# Altium PCB transmitter.PcbDoc
Units mil, origin at the board's own origin, x right, y up, seen from the top; angles counter-clockwise.
Board outline 1968.5 x 3897.64 mil, 2 copper layers (Top Layer, Bottom Layer); 38 components, 10 nets, 105 pads, 26 vias.
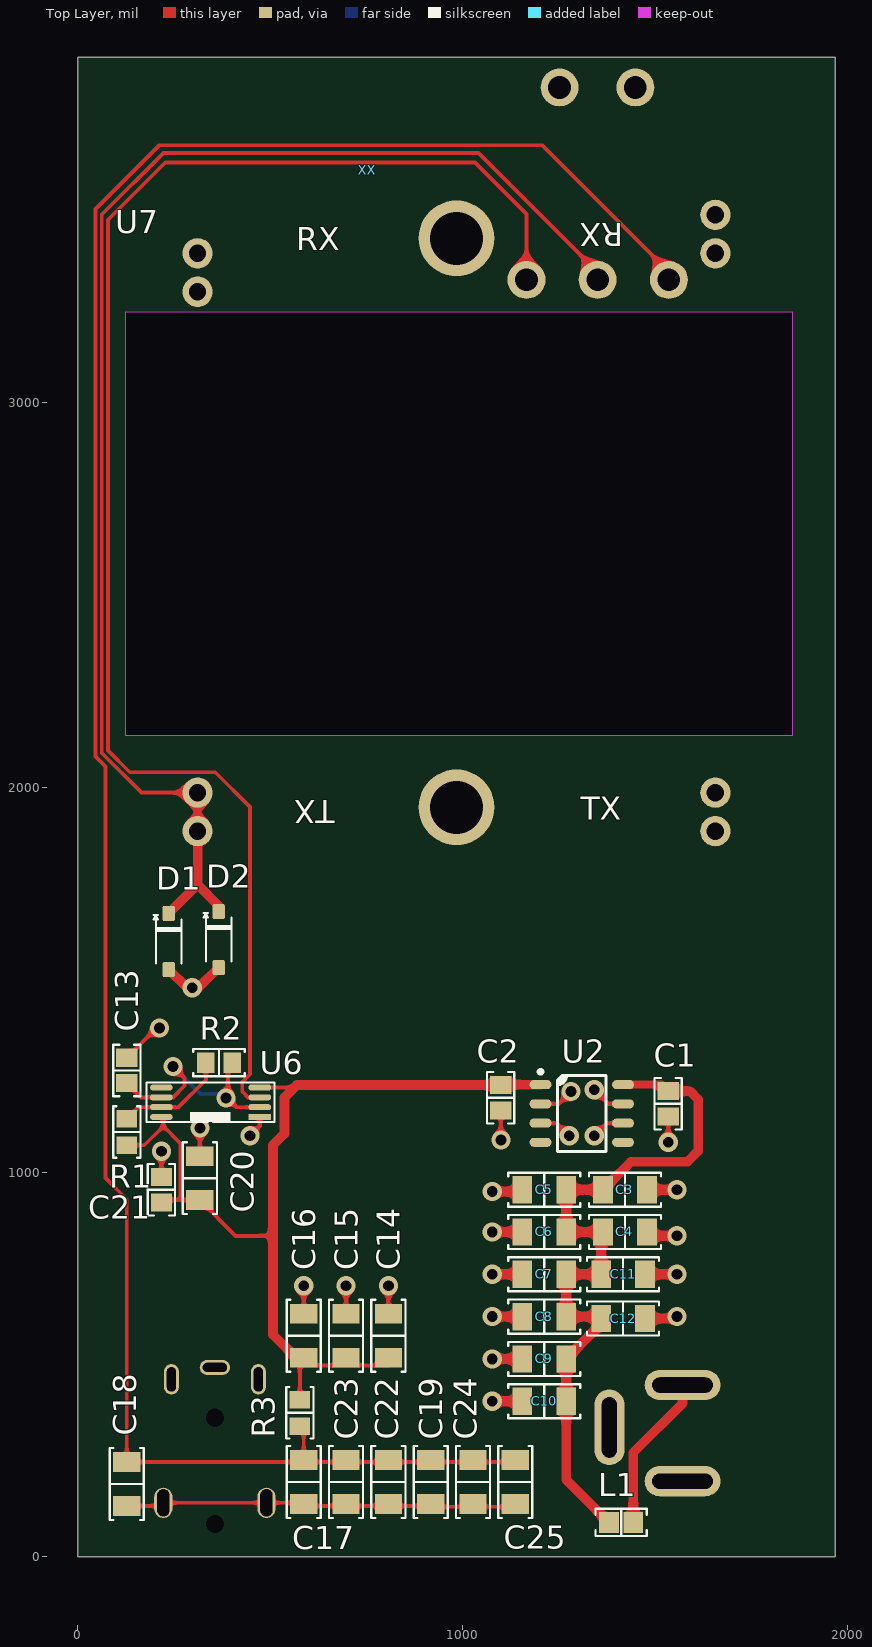
[diagram p0: Top Layer view]
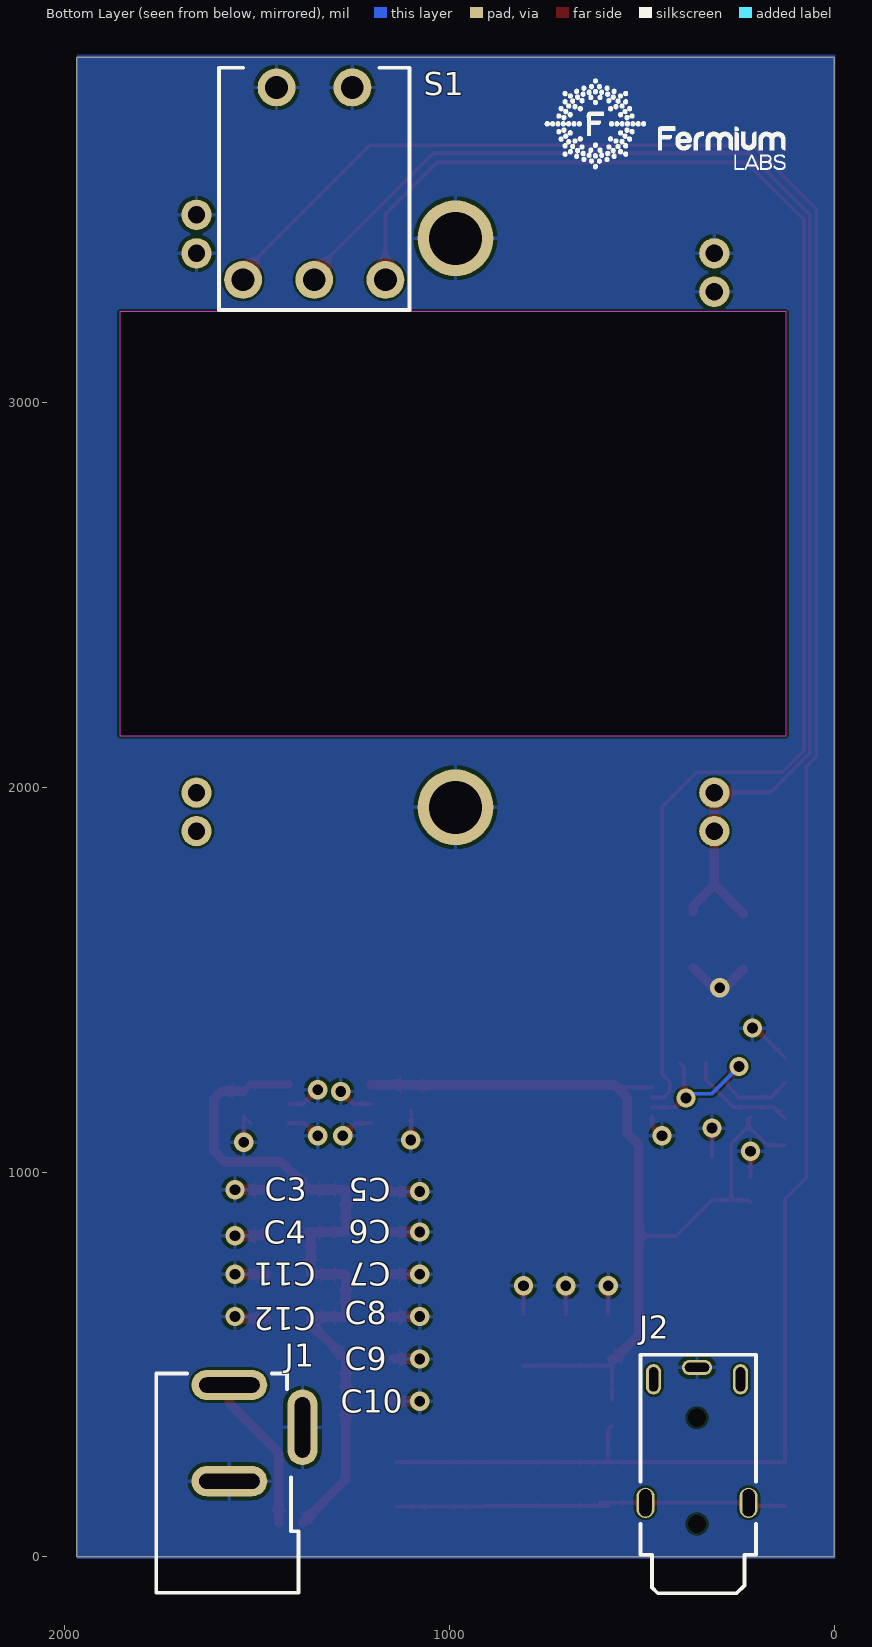
[diagram p1: Bottom Layer view, seen from below]
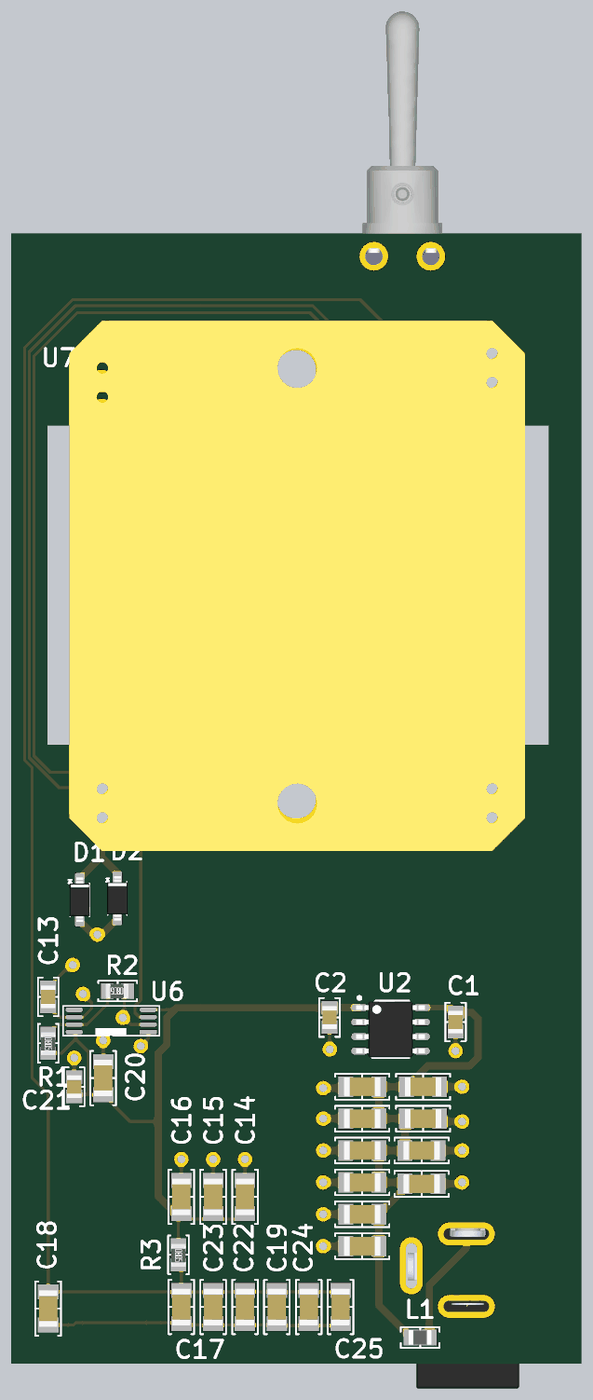
[diagram p2: 3D render of the assembled board from above, using the file's embedded part models]
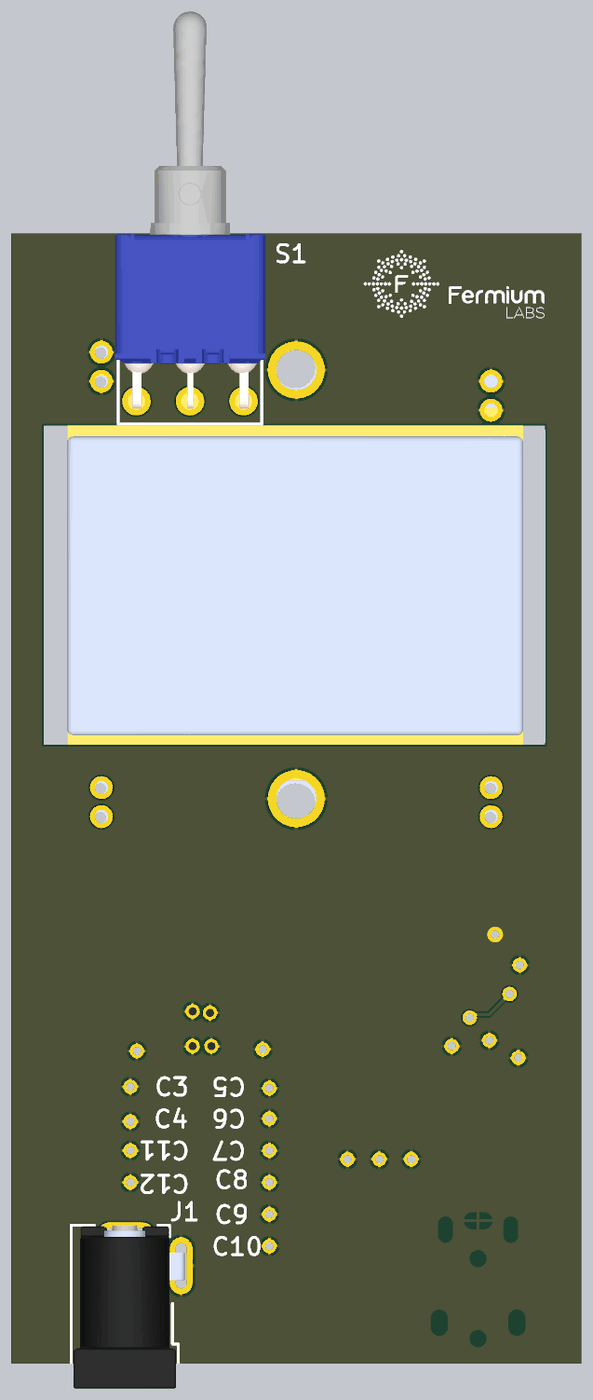
[diagram p3: 3D render of the assembled board from below, using the file's embedded part models]

## Layer stack, top to bottom
Top Solder: solder mask 0.4, Solder Resist, Dk 3.5
Top Layer: signal copper 1.4
Dielectric 1: dielectric 12.6, FR-4, Dk 4.8
Bottom Layer: signal copper 1.4
Bottom Solder: solder mask 0.4, Solder Resist, Dk 3.5

## Board outline
0,0 1968.5,0 1968.5,3897.64 0,3897.64

## Design rules (kind name [scope] priority, off if disabled: settings)
Clearance [All] p1: gap=6 ignorepadtopadclearanceinfootprint=FALSE
FanoutControl Fanout_LCC [All] p1 off: bgadir=Out bgaviamode=Centered fanoutstyle=Auto fanoutdirection=Alternating viagrid=1 // Protel DXP Scope 1 Expression Was: IsLCC   Fanout_LCC (Default Rule)
FanoutControl Fanout_BGA [All] p2 off: bgadir=Out bgaviamode=Centered fanoutstyle=Auto fanoutdirection=Alternating viagrid=1 // Protel DXP Scope 1 Expression Was: IsBGA   Fanout_BGA (Default Rule)
FanoutControl Fanout_SOIC [All] p3 off: bgadir=Out bgaviamode=Centered fanoutstyle=Auto fanoutdirection=Alternating viagrid=1 // Protel DXP Scope 1 Expression Was: IsSOIC   Fanout_SOIC (Default Rule)
FanoutControl Fanout_Default [All] p4: bgadir=Out bgaviamode=Centered fanoutstyle=Auto fanoutdirection=Alternating viagrid=1 // Fanout_Default (Default Rule)
FanoutControl Fanout_Small [All] p5 off: bgadir=Out bgaviamode=Centered fanoutstyle=Auto fanoutdirection=Alternating viagrid=1 // Protel DXP Scope 1 Expression Was: (CompPinCount < 5)   Fanout_Small (Default Rule)
HoleSize [All] p1: absolutevalues=TRUE maxlimit=99999 minlimit=11.81 maxpercent=80.000 minpercent=20.000
MinimumSolderMaskSliver [All] p1 off: minsoldermaskwidth=10
PolygonConnect [All] p1: connectstyle=Relief reliefconductorwidth=10 reliefentries=4 polygonreliefangle="90 Angle" airgapwidth=10
RoutingVias [All] p1: holewidth=28 width=50 viastyle="Through Hole" minholewidth=28 minwidth=50 maxholewidth=28 maxwidth=50
SilkToSilkClearance [All] p1: silktosilkclearance=7.87
SilkToSolderMaskClearance [All] p1 off: minsilkscreentomaskgap=10 clearancetoexposedcopper=TRUE // Protel DXP Scope 1 Expression Was: IsPad
SolderMaskExpansion [All] p1: expansion=2
Width [All] p1: maxlimit=200 minlimit=6 preferedwidth=10
21 further rules are at their usual default settings.

## Components (designator, comment, footprint, x,y, rotation, side; value= is the part's Value field where it differs from the comment)
C1 "" "CAP 0805/2012" 1534.57,1177.91 r270 top
C2 "" "CAP 0805/2012" 1099.24,1193.65 r270 top
C3 "" "CAP 1206/3216" 1422.24,954.65 r0 top
C4 "" "CAP 1206/3216" 1422.24,844.65 r0 top
C5 "" "CAP 1206/3216" 1212.24,954.65 r180 top
C6 "" "CAP 1206/3216" 1212.24,844.65 r180 top
C7 "" "CAP 1206/3216" 1212.24,734.65 r180 top
C8 "" "CAP 1206/3216" 1212.24,624.65 r180 top
C9 "" "CAP 1206/3216" 1212.24,514.65 r180 top
C10 "" "CAP 1206/3216" 1212.24,404.65 r180 top
C11 "" "CAP 1206/3216" 1417.24,734.65 r0 top
C12 "" "CAP 1206/3216" 1417.24,619.65 r0 top
C13 "" "CAP 0805/2012" 127.24,1264.65 r90 top
C14 "" "CAP 1206/3216" 807.24,574.65 r90 top
C15 "" "CAP 1206/3216" 697.24,574.65 r90 top
C16 "" "CAP 1206/3216" 587.24,574.65 r90 top
C17 "" "CAP 1206/3216" 587.24,194.65 r270 top
C18 "" "CAP 1206/3216" 127.24,189.65 r270 top
C19 "" "CAP 1206/3216" 917.24,194.65 r270 top
C20 "" "CAP 1206/3216" 317.24,984.65 r90 top
C21 "" "CAP 0805/2012" 217.24,954.65 r90 top
C22 "" "CAP 1206/3216" 807.24,194.65 r270 top
C23 "" "CAP 1206/3216" 697.24,194.65 r270 top
C24 "" "CAP 1206/3216" 1027.24,194.65 r270 top
C25 "" "CAP 1206/3216" 1137.24,194.65 r270 top
D1 "D Zener" SOD123 236.24,1599.65 r270 top
D2 "" SOD123 366.24,1604.65 r270 top
J1 "" dc-jack 1571.8,446.85 r270 bottom
J2 "" FC68125 -196.76,-854.35 r90 bottom
L1 "Inductor Iron" "FER 0805/2012" 1412.24,89.65 r180 top
R1 "Res1" "RES 0805/2012" 127.24,1104.65 r270 top value=1K
R2 "Res1" "RES 0805/2012" 367.24,1284.65 r180 top value=10K
R3 "Res1" "RES 0805/2012" 577.24,374.65 r270 top value=33
S1 "TSM102C3" TSM102C3 1536.24,3319.65 r180 bottom
U2 "L78L06ACD" "ST SOIC-8N" 1309.96,1152.65 r0 top
U6 "NE555PWR" TSSOP8 473.15,1143.46 r180 top
U7 "HB100" HB100-BURIED 1657.24,1886.65 r90 top
XX "fermiumlabs-logo" frm-med 752.24,3604.65 r180 top

## Footprints (in the part's own frame and the unit in brackets; to place one, negate y for a bottom-side part, rotate by r counter-clockwise, add the part's x,y. Pads: shape width x height; smd on the part's side, far side on the other; paste and mask are expansions set on the pad)
"CAP 0805/2012" [mm] "Chip Capacitor, 2-Leads, Body 2.00x1.20mm, IPC Medium Density"
  rect 1.2x1.4 smd: 1(-0.838,0) 2(0.838,0)
  silkscreen extent -1.7,-0.9 1.7,0.9, body extent -1,-0.64 1,0.64, height 1.26
"CAP 1206/3216" [mm] "Chip Capacitor, 2-Leads, Body 3.25x1.60mm, IPC Medium Density"
  rect 1.3x1.8 smd: 1(-1.45,0) 2(1.45,0)
  silkscreen extent -2.37,-1.12 2.37,1.12, body extent -1.6,-0.81 1.6,0.81, height 1.62
dc-jack [mm]
  oval 2x5 hole 1 slot 4 at 90 deg: 1(0,0) 3(6.35,0)
  oval 5x2 hole 1 slot 4 at 0 deg: 2(2.794,4.826)
  silkscreen extent -0.76,-4.83 13.72,4.57, body extent -0.76,-4.62 13.54,5.13, height 11.3
FC68125 [mm]
  oval 1x2 hole 0.6 slot 1.6 at 90 deg: 1(34.214,14.046)
  oval 2x1 hole 0.6 slot 1.6 at 0 deg: 2(33.426,16.916) 6(33.426,11.176)
  oval 2x1.2 hole 0.8 slot 1.8 at 0 deg: 3(25.273,10.643) 3(25.273,17.45)
  round 0 hole 1.2: ""(23.876,14.046) ""(30.886,14.046)
  silkscreen extent 19.3,10.16 35.05,17.78, body extent 19.37,10.31 34.47,17.71, height 6.2
"FER 0805/2012" [mm] "Chip Ferrite, 2-Leads, Body 2.00x1.20mm, IPC Medium Density"
  rect 1.3x1.4 smd: 1(-0.8,0) 2(0.8,0)
  silkscreen extent -1.7,-0.9 1.7,0.9, body extent -1,-0.64 1,0.64, height 1.26
frm-med [mil]
HB100-BURIED [mm]
  round 2 hole 1.143: 1(0,34.188) 1(2.54,34.188) 2(0,0) 2(2.54,0) 3(38.151,0) 3(40.691,0) 4(35.611,34.188) 4(38.151,34.188)
  round 5 hole 3.5: 5(1.575,17.094) 5(39.141,17.094)
  Keep-Out Layer board cut-out: 6.286,-5.066 6.286,38.934 34.286,38.934 34.286,-5.066
  body extent -3.02,-3 43.48,37, height 3
"RES 0805/2012" [mm] "Chip Resistor, 2-Leads, Body 2.00x1.25mm, IPC Medium Density"
  rect 1.15x1.35 smd: 1(-0.875,0) 2(0.875,0)
  silkscreen extent -1.7,-0.9 1.7,0.9, body extent -0.95,-0.62 1.05,0.63, height 0.6
SOD123 [mm] "SOD-123; 2 Leads; Body 2.7 x 1.6 mm, (LxW)"
  round 0.508 on Mech15: 0(0,0)
  rrect25% 1x0.8 smd: A(1.85,0) K(-1.85,0)
  silkscreen extent -1.75,-1 1.45,0.85, body extent -1.95,-0.9 1.95,0.9, height 1.18
"ST SOIC-8N" [mm] "SOIC, 8-Leads, Body 4.90x3.90mm, Pitch 1.27mm, IPC Medium Density"
  oval 1.45x0.6 smd: 1(-2.725,1.905) 2(-2.725,0.635) 3(-2.725,-0.635) 4(-2.725,-1.905) 5(2.725,-1.905) 6(2.725,-0.635) 7(2.725,0.635) 8(2.725,1.905)
  silkscreen extent -2.85,-2.5 1.6,2.88, body extent -3.01,-2.45 3.01,2.45, height 1.5
TSM102C3 [mm]
  round 2.5 hole 1.5: 1(0,0) 2(4.699,0) 3(9.398,0) G(2.21,12.7) G(7.214,12.7)
  silkscreen extent -1.6,-2 11,14, body extent -1.9,-0.65 11.3,34.15, height 8.47
TSSOP8 [mm]
  rect 1.5x0.4 smd: 1(0,0)
  oval 1.5x0.4 smd: 2(0,-0.65) 3(0,-1.3) 4(0,-1.95) 5(6.5,-1.95) 6(6.5,-1.3) 7(6.5,-0.65) 8(6.5,0)
  silkscreen extent -0.98,-2.28 7.48,0.33, body extent -0.06,-2.26 6.52,0.3, height 1.04

## Part data
C1 C2 C13 C21: library part Cap2, "Capacitor", Capacitance=100nF, Capacitor kind=MLCC, Capacitor type=ceramic, Case - inch=0805, Case - mm=2012, Dielectric=X7R, Manufacturer=YAGEO, Manufacturer Part Number=CC0805JRX7R9BB104, Operating voltage=50V, Supplier Part Number 1=CC0805JRX7R9104, Tolerance=±5%, Category="0805 MLCC SMD Capacitors", ComponentLink1Description=http://static.tme.eu/products_pics/d/b/b/dbbd93eaf25225110ca26eb66da77328/58538.jpg, ComponentLink1URL=http://static.tme.eu/products_pics/d/b/b/dbbd93eaf25225110ca26eb66da77328/58538.jpg, MinAmount=100, Mounting=SMD, Multiples=100, Pads="2 SMD", Price Type=NET, Pricing 1="100=0.00613, 300=0.00464, 1000=0.00342, 4000=0.00284, 20000=0.00273 (EUR)", Stock 1=89911, SuppliedAmount=0, Supplier 1=TME, Unit=pcs, Weight=0.042
C3 C4 C5 C6 C7 C8 C9 C10 C11 C12 C14 C15 C16 C17 C18 C19 C20 C22 C23 C24 C25: library part Cap2, "Capacitor", Capacitance=10µF, Capacitor kind=MLCC, Capacitor type=ceramic, Case - inch=1206, Case - mm=3216, Dielectric=X5R, Manufacturer=SAMSUNG, Manufacturer Part Number=CL31A106KAHNNNE, Operating temperature=-55...85°C, Operating voltage=25V, Tolerance=±10%, Category="1206 MLCC SMD Capacitors", ComponentLink1Description=http://static.tme.eu/products_pics/b/e/9/be9e0dd298dcf4979ea1dd3d226e0bfa/58780.jpg, ComponentLink1URL=http://static.tme.eu/products_pics/b/e/9/be9e0dd298dcf4979ea1dd3d226e0bfa/58780.jpg, MinAmount=100, Mounting=SMD, Multiples=100, PackageDescription=1206, PackageReference=CAPR5-4X5, Pads="2 SMD", Price Type=NET, Pricing 1="100=0.0248, 300=0.0203, 1000=0.0167, 2000=0.0131, 10000=0.0127 (EUR)", Published=23-Sep-2002, Publisher="Altium Limited", Stock 1=279700, SuppliedAmount=0, Supplier 1=TME, Supplier Part Number 1=CL31A106KAHNNNE, Unit=pcs, Weight=0.061
D1: "Zener Diode", Current=5A, Forward Voltage=900mV, Manufacturer=Diodes, Manufacturer Part Number=BZT52C5V6-7-F, Max Operating Temperature=150°C, Max Power Dissipation=500mW, Max Reverse Leakage Current=1uA, Min Operating Temperature=-65°C, Output Current=50mA, Package Quantity=3000, Test Current=5mA, Tolerance=7%, Voltage Rating (DC)=5.6V, ComponentLink1Description=https://datasheet.ciiva.com/15142/getdatasheetpartid-75147-15142419.pdf, ComponentLink1URL=https://datasheet.ciiva.com/15142/getdatasheetpartid-75147-15142419.pdf, ComponentLink2Description=https://datasheet.ciiva.com/34302/1539665-34302376.pdf, ComponentLink2URL=https://datasheet.ciiva.com/34302/1539665-34302376.pdf, Contact plating=Tin,Matte, Element Configuration=Single, ESD Protection=No, Height=1.35mm, Impedance=40R, Lead Free="Lead Free", Length=2.85mm, Mount="Surface Mount", Number of Pins=2, Packaging="Tape and Reel", Peak Reverse Current=1uA, Power Dissipation=500mW, Power Rating=500mW, Pricing 1="25=0.0253, 100=0.0218, 250=0.0175, 1000=0.0163, 3000=0.0153 (USD)", Radiation Hardening=No, Stock 1=1325, Supplier 1=TME, Supplier Part Number 1=BZT52C5V6-7-F, Termination=SMD/SMT, Voltage Tolerance=7%, Weight=0.000353oz, Width=1.7mm, Working Voltage=5.6V, Zener Current=5mA, Zener Voltage=5.6V
D2: library part "D Schottky", "Schottky Diode", Average Rectified Current=500mA, Case=SOD123, Case/Package=SOD-123-2, Forward Voltage=385mV, Forward voltage at If=390mV, Manufacturer="FAIRCHILD SEMICONDUCTOR", Manufacturer Part Number=MBR0520L, Max Forward Surge Current (Ifsm)=5.5A, Max Operating Temperature=125°C, Max Repetitive Reverse Voltage (Vrrm)=20V, Max Reverse Leakage Current=250uA, Min Operating Temperature=-65°C, Package Quantity=3000, Category="SMD Schottky Diodes", Code_JEDEC=DO-214-AA, ComponentLink1Description=http://static.tme.eu/products_pics/e/d/b/edbd030cb344fc64745afa0f91101952/285567.jpg, ComponentLink1URL=http://static.tme.eu/products_pics/e/d/b/edbd030cb344fc64745afa0f91101952/285567.jpg, ComponentLink2Description=https://datasheet.ciiva.com/915/mbr0520lt1-d-915488.pdf, ComponentLink2URL=https://datasheet.ciiva.com/915/mbr0520lt1-d-915488.pdf, ComponentLink3Description=https://datasheet.ciiva.com/14168/sy600925-e-14168052.pdf, ComponentLink3URL=https://datasheet.ciiva.com/14168/sy600925-e-14168052.pdf, ComponentLink4Description=https://datasheet.ciiva.com/915/mbr0520lt1-d-915489.pdf, ComponentLink4URL=https://datasheet.ciiva.com/915/mbr0520lt1-d-915489.pdf, ComponentLink5Description=https://datasheet.ciiva.com/915/mbr0520lt1-d-915490.pdf, ComponentLink5URL=https://datasheet.ciiva.com/915/mbr0520lt1-d-915490.pdf, ComponentLink6Description=https://datasheet.ciiva.com/7961/mbr0520lt1-d-7961765.pdf, ComponentLink6URL=https://datasheet.ciiva.com/7961/mbr0520lt1-d-7961765.pdf, ComponentLink7Description=https://datasheet.ciiva.com/25954/mbr0520lt1-d-25954134.pdf, ComponentLink7URL=https://datasheet.ciiva.com/25954/mbr0520lt1-d-25954134.pdf, ComponentLink8Description=https://datasheet.ciiva.com/5762/mbr0520lt1-d-5762889.pdf, ComponentLink8URL=https://datasheet.ciiva.com/5762/mbr0520lt1-d-5762889.pdf, ComponentLink9Description=https://datasheet.ciiva.com/16395/mbr0520lt1-d-16395977.pdf, ComponentLink9URL=https://datasheet.ciiva.com/16395/mbr0520lt1-d-16395977.pdf, ComponentLink10Description=https://datasheet.ciiva.com/16475/mbr0520lt1-d-16475465.pdf, ComponentLink10URL=https://datasheet.ciiva.com/16475/mbr0520lt1-d-16475465.pdf, ComponentLink11Description=https://datasheet.ciiva.com/29886/mbr0520lt1-d-29886377.pdf, ComponentLink11URL=https://datasheet.ciiva.com/29886/mbr0520lt1-d-29886377.pdf, ComponentLink12Description=https://datasheet.ciiva.com/7962/mbr0520lt1-d-7962698.pdf, ComponentLink12URL=https://datasheet.ciiva.com/7962/mbr0520lt1-d-7962698.pdf, ComponentLink13Description=https://datasheet.ciiva.com/14559/70099495-14559898.pdf, ComponentLink13URL=https://datasheet.ciiva.com/14559/70099495-14559898.pdf, ComponentLink14Description=https://datasheet.ciiva.com/5762/mbr0520lt1-d-5762891.pdf, ComponentLink14URL=https://datasheet.ciiva.com/5762/mbr0520lt1-d-5762891.pdf, ComponentLink15Description=https://datasheet.ciiva.com/7962/mbr0520lt1-d-7962699.pdf, ComponentLink15URL=https://datasheet.ciiva.com/7962/mbr0520lt1-d-7962699.pdf, ComponentLink16Description=https://datasheet.ciiva.com/4714/mbr0520lt1-d-94265-4714156.pdf, ComponentLink16URL=https://datasheet.ciiva.com/4714/mbr0520lt1-d-94265-4714156.pdf, Contact plating=Tin,Matte, Current Rating=500mA, Diode type="Schottky rectifying", Element Configuration=Single, Forward Current=500mA, Height=1.12mm, LatestRevisionDate=17-Jul-2002, LatestRevisionNote="Re-released for DXP Platform.", Lead Free="Lead Free", Length=2.69mm, Load current=500mA, Max Reverse Voltage (DC)=20V, Max Surge Current=5.5A, MinAmount=10, Mounting=SMD, Multiples=1, Number of Pins=2, Off state voltage max.=20V, Output Current=500mA, PackageDescription="DO-214-AA/SMB; 2 C-Bend Leads; Body 5.3 x 3.6 mm, inc. leads (LxW)", PackageReference=SMB, Packaging="Tape and Reel", Pads="2 SMD", Peak Non-Repetitive Surge Current=5.5A, Peak Reverse Current=250uA, Polarity=Standard, Price Type=NET, Pricing 1="10=0.0403, 50=0.0376, 250=0.0333, 1000=0.03, 3000=0.0281 (EUR)", Pricing 2="10=0.0667, 50=0.0416, 250=0.0334, 1000=0.03, 3000=0.028 (USD)", Published=8-Jun-2000, Publisher="Altium Limited", Radiation Hardening=No, REACH SVHC="No SVHC", Stock 1=24595, Stock 2=11077, SuppliedAmount=0, Supplier 1=TME, Supplier 2=TME, Supplier Part Number 1=MBR0520L, Supplier Part Number 2=MBR0520LT1G, Termination=SMD/SMT, Unit=pcs, Voltage Rating (DC)=20V, Weight=0.032, Width=1.6mm
J1: library part jackdc, Manufacturer=CLIFF, Manufacturer Part Number="DC-10A FC68148", Package type="in bulk", Rated current=5A, Rated voltage="12V DC", Supplier Part Number 1=FC68148, Category="DC power connectors", ComponentLink1Description=http://static.tme.eu/products_pics/f/8/e/f8eb2e1bea4ffe6692f5958f8ef9edd4/323250.jpg, ComponentLink1URL=http://static.tme.eu/products_pics/f/8/e/f8eb2e1bea4ffe6692f5958f8ef9edd4/323250.jpg, Connector=socket, Connector type="DC supply", Connector variant="with on/off switch", Contact size=5,5/2,1mm, Electrical mounting=soldering, MinAmount=1, Multiples=1, Pads="3 THT", Plug inside diameter=2.1mm, Plug outside diameter=5.5mm, Price Type=NET, Pricing 1="1=0.4194, 20=0.3065, 100=0.2581, 500=0.2258 (USD)", Spatial orientation="angled 90°", Stock 1=20287, SuppliedAmount=0, Supplier 1=TME, Unit=pcs, Weight=1.733
J2: library part FC68125, Manufacturer=CLIFF, Category="Jack connectors", ComponentLink1Description=http://static.tme.eu/products_pics/9/3/a/93a060f269bb569398921100f84c519a/360179.jpg, ComponentLink1URL=http://static.tme.eu/products_pics/9/3/a/93a060f269bb569398921100f84c519a/360179.jpg, Connector=socket, Connector type="Jack 3,5mm", Depth=15.1mm, Electrical mounting=THT, Height=6mm, Manufacturer Part Number=FC68125, MinAmount=2, Multiples=1, Number of ways=4, Pads="5 THT", Price Type=NET, Pricing 1="2=0.41, 20=0.37, 100=0.33, 500=0.28 (USD)", Stock 1=1312, SuppliedAmount=0, Supplier 1=TME, Supplier Part Number 1=FC68125, Unit=pcs, Weight=0.942, Width=7.1mm
L1: "Magnetic-Core Inductor", Case/Package=0805, Case Code (Metric)=2012, Current Rating=500mA, DC Current=200mA, DC Resistance (DCR)=280mR, Frequency=100MHz, Manufacturer=Murata, Manufacturer Part Number=BLM21AG102SN1D, Max Current Rating=600mA, Max Operating Temperature=125°C, Min Operating Temperature=-55°C, Package Quantity=1, Tolerance=25%, Case Code (Imperial)=0805, ComponentLink1Description=https://datasheet.ciiva.com/19454/1845136-19454717.pdf, ComponentLink1URL=https://datasheet.ciiva.com/19454/1845136-19454717.pdf, ComponentLink2Description=https://datasheet.ciiva.com/18093/getdatasheetpartid-139643-18093010.pdf, ComponentLink2URL=https://datasheet.ciiva.com/18093/getdatasheetpartid-139643-18093010.pdf, ComponentLink3Description=https://datasheet.ciiva.com/29347/442432-da-01-en-chip-drossel-0805-1000r-200ma-2-0x1-25mm-29347996.pdf, ComponentLink3URL=https://datasheet.ciiva.com/29347/442432-da-01-en-chip-drossel-0805-1000r-200ma-2-0x1-25mm-29347996.pdf, ComponentLink4Description=https://datasheet.ciiva.com/41449/001172322-da-01-en-drossel-0805-1000r-2-0x1-25mm-4000st-41449636.pdf, ComponentLink4URL=https://datasheet.ciiva.com/41449/001172322-da-01-en-drossel-0805-1000r-2-0x1-25mm-4000st-41449636.pdf, ComponentLink5Description=https://datasheet.ciiva.com/6212/l0110s0100blm21a-6212318.pdf, ComponentLink5URL=https://datasheet.ciiva.com/6212/l0110s0100blm21a-6212318.pdf, ComponentLink6Description=https://datasheet.ciiva.com/16286/l0110s0100blm21a-16286461.pdf, ComponentLink6URL=https://datasheet.ciiva.com/16286/l0110s0100blm21a-16286461.pdf, ComponentLink7Description=https://datasheet.ciiva.com/8021/l0110s0100blm21a-8021550.pdf, ComponentLink7URL=https://datasheet.ciiva.com/8021/l0110s0100blm21a-8021550.pdf, ComponentLink8Description=https://datasheet.ciiva.com/8021/l0110s0100blm21a-8021548.pdf, ComponentLink8URL=https://datasheet.ciiva.com/8021/l0110s0100blm21a-8021548.pdf, ComponentLink9Description=https://datasheet.ciiva.com/3081/l0110s0100blm21a-3081640.pdf, ComponentLink9URL=https://datasheet.ciiva.com/3081/l0110s0100blm21a-3081640.pdf, ComponentLink10Description=https://datasheet.ciiva.com/25903/l0110s0100blm21a-25903493.pdf, ComponentLink10URL=https://datasheet.ciiva.com/25903/l0110s0100blm21a-25903493.pdf, ComponentLink11Description=https://datasheet.ciiva.com/3082/l0110s0100blm21a-3082728.pdf, ComponentLink11URL=https://datasheet.ciiva.com/3082/l0110s0100blm21a-3082728.pdf, ComponentLink12Description=https://datasheet.ciiva.com/6212/l0110s0100blm21a-6212347.pdf, ComponentLink12URL=https://datasheet.ciiva.com/6212/l0110s0100blm21a-6212347.pdf, ComponentLink13Description=https://datasheet.ciiva.com/6212/l0110s0100blm21a-6212345.pdf, ComponentLink13URL=https://datasheet.ciiva.com/6212/l0110s0100blm21a-6212345.pdf, Core Material=Ferrite, Depth=1.25mm, Height=0.85mm, Impedance=1KR, Lead Free="Lead Free", Length=2mm, Material=Steel,Ferrite, Max DC Current=200mA, Military Standard=Not, Number of Circuits=1, Number of Lines=1, Number of Pins=2, Packaging="Tape and Reel", Pricing 1="25=0.068, 100=0.0551, 1000=0.0451, 4000=0.0397 (USD)", Radiation Hardening=No, REACH SVHC="No SVHC", Shielding=Unshielded, Stock 1=53975, Supplier 1=TME, Supplier Part Number 1=BLM21AG102SN1D, Termination=SMD/SMT, Test Frequency=100MHz, Weight=0.000194oz, Width=1.25mm
R1: "Resistor", Manufacturer="Royal Electronic Factory", Manufacturer Part Number=0805S8J0102T5E, Supplier Part Number 1=SMD0805-1K, Pricing 1="100=0.0062, 1000=0.0024, 5000=0.0008, 15000=0.0008, 50000=0.0008 (USD)", Stock 1=2713700, Supplier 1=TME
R2: "Resistor", Manufacturer="Royal Electronic Factory", Manufacturer Part Number=0805S8J0103T5E, Supplier Part Number 1=SMD0805-10K, Pricing 1="100=0.0065, 1000=0.0023, 5000=0.0008, 15000=0.0008, 50000=0.0008 (USD)", Stock 1=1600500, Supplier 1=TME
R3: "Resistor", Case/Package=0805, Case Code (Metric)=2012, Manufacturer=Yageo, Manufacturer Part Number=RC0805JR-0733RL, Max Operating Temperature=155°C, Min Operating Temperature=-55°C, Power Rating=125mW, Resistance=33R, Supplier Part Number 1=RC0805JR-0733R, Temperature Coefficient=100ppm/°C, Tolerance=5%, Voltage Rating=150V, Case Code (Imperial)=0805, ComponentLink1Description=https://datasheet.ciiva.com/7941/442941-7941948.pdf, ComponentLink1URL=https://datasheet.ciiva.com/7941/442941-7941948.pdf, ComponentLink2Description=https://datasheet.ciiva.com/7941/442941-7941947.pdf, ComponentLink2URL=https://datasheet.ciiva.com/7941/442941-7941947.pdf, ComponentLink3Description=https://datasheet.ciiva.com/17053/rc0805-17053447.pdf, ComponentLink3URL=https://datasheet.ciiva.com/17053/rc0805-17053447.pdf, Composition="Thick Film", Contact plating=Tin,Lead,Matte, Depth=1.25mm, Height=0.5mm, Lead Free="Lead Free", Length=2mm, Military Standard=Not, Packaging="Tape and Reel", Pricing 1="100=0.0052, 1000=0.0031, 5000=0.001, 15000=0.001, 50000=0.0008 (USD)", Radiation Hardening=No, REACH SVHC=Unknown, Stock 1=2800, Supplier 1=TME, Termination=SMD/SMT, Weight=0.000194oz, Width=1.25mm
U7: Manufacturer="China unspecified", Manufacturer Part Number=HB100, Supplier 1=Alibaba, Supplier Part Number 1=HB100
S1: Supplier 1=TME, Supplier Part Number 1=TSM102C3
U2: Supplier 1=TME, Supplier Part Number 1=L78L06ACD
U6: Supplier 1=TME, Supplier Part Number 1=NE555PWR

## Via types
v1: diameter 50, hole 28, Top Layer to Bottom Layer, 26 vias

## Nets (pads, with @x,y where several pads share a name; then routed paths per layer and width w, separated by ;. In a path a pad name is that pad's centre, name@x,y a point inside that pad or via, vN(x,y) a via of type N, cw(c..) or ccw(c..) an arc to the next point about the centre after c; other vN are vias at no path point)
12V: C1.1 C3.1 C4.1 C5.1 C6.1 C7.1 C8.1 C9.1 C10.1 C11.1 C12.1 L1.2 U2.8 | length 1956
  Top Layer w10: C1.1@1517.57,1227.91 C1.1
  Top Layer w20: U2.8@1416.85,1227.91 C1.1@1517.57,1227.91
  Top Layer w25: L1.2 1269.33,201.06 C10.1 C9.1 1360.16,605.47 C12.1 1355.16,624.65 C8.1 C7.1 C11.1 1360.16,839.65 C4.1 C6.1 C5.1 C3.1 1437.66,1027.15 1584.74,1027.15 1612.24,1054.65 1612.24,1189.65 1590.98,1210.91 C1.1
GND: C1.2 C2.2 C3.2 C4.2 C5.2 C6.2 C7.2 C8.2 C9.2 C10.2 C11.2 C12.2 C13.2 C14.2 C15.2 C16.2 C20.2 C21.2 D1.A D2.A J1.2 J1.3 J2.1 S1.G U2.2 U2.3 U2.6 U2.7 U6.1 U7.3 U7.4 U7.5 | length 1984.3
  Top Layer w10: C13.2 204.24,1374.65 v1(212.24,1374.65) ; C21.2 v1(217.24,1054.65) ; C20.2 v1(317.24,1114.65) ; v1(447.24,1094.65) 473.15,1120.55 U6.1 ; C16.2 v1@587.24,694.65 ; C15.2 v1@697.24,684.65 ; C14.2 v1@807.24,694.65 ; C2.2 1099.24,1084.65 v1(1100.24,1083.65) ; U2.3 1244.24,1127.65 v1(1277.24,1094.65) ; U2.2 1250.24,1177.65 v1(1282.24,1209.65) ; v1(1342.24,1094.65) 1375.24,1127.65 U2.6 ; v1(1342.24,1214.65) 1379.24,1177.65 U2.7 ; C1.2@1517.57,1127.91 C1.2 v1(1534.57,1077.91)
  Top Layer w25: D1.A 283.41,1479.65 v1(297.24,1479.65) 314.08,1479.65 D2.A ; v1(1077.24,404.65) C10.2 ; v1(1077.24,514.65) C9.2@1147.24,514.65 ; v1(1077.24,624.65) C8.2 ; v1(1077.24,734.65) C7.2 ; v1(1077.24,844.65) C6.2 ; v1(1077.24,949.65) 1150.16,949.65 C5.2 ; C12.2 1552.24,619.65 v1(1557.24,624.65) ; C11.2 v1(1557.24,734.65) ; C4.2 1489.33,834.65 v1(1557.24,834.65) ; C3.2 v1(1557.24,954.65)
  other v1: 587.24,704.65 697.24,704.65 807.24,704.65
NetC13_1: C13.1 R2.1 U6.2 U6.6 | length 602.1
  Top Layer w10: C13.1 164.24,1194.65 U6.6 247.24,1194.65 277.24,1224.65 277.24,1244.65 v1(247.24,1274.65) ; R2.1 390.24,1273.2 390.24,1191.65 412.83,1169.06 U6.2
  Bottom Layer w10: v1(247.24,1274.65) 317.74,1204.15 373.74,1204.15 v1(385.24,1192.65)
NetC17_1: C17.1 C18.1 C19.1 C22.1 C23.1 C24.1 C25.1 R3.2 S1.1 | length 6114.4
  Top Layer w10: R3.2 587.24,330.2 C17.1 C17.1@587.24,246.73 ; C25.1@1137.24,244.65 1135.16,246.73 C17.1@587.24,246.73 ; S1.1 1536.24,3339.65 1206.24,3669.65 212.24,3669.65 46.24,3503.65 46.24,2080.65 72.24,2054.65 72.24,984.65 127.24,929.65 C18.1 C17.1@587.24,246.73
NetC17_2: C17.2 C18.2 C19.2 C22.2 C23.2 C24.2 C25.2 J2.3 | length 1047
  Top Layer w10: C18.2 214.16,132.56 222.24,140.65 490.24,140.65 C17.2@595.33,140.65 ; C17.2@608.24,141.56 607.33,140.65 C17.2@595.33,140.65 ; C25.2@1137.24,130.47 1027.24,130.47 909.33,130.47 907.24,132.56 807.24,132.56 697.24,132.56 587.24,132.56 C17.2@595.33,140.65
NetD1_K: D1.K D2.K S1.2 U7.1 | length 3633.4
  Top Layer w10: U7.1@311.24,1886.65 311.24,1986.65 165.24,1986.65 62.24,2089.65 62.24,3489.65 222.24,3649.65 1041.24,3649.65 1351.24,3339.65 S1.2
  Top Layer w25: D1.K 311.24,1747.48 ; U7.1@311.24,1886.65 311.24,1747.48 ; D2.K 366.24,1692.48 311.24,1747.48
NetJ1_1: J1.1 L1.1 | length 410.3
  Top Layer w25: L1.1 1443.74,271.14 1571.8,399.2 J1.1
NetR1_1: R1.1 R2.2 U6.7 | length 291.9
  Top Layer w10: R1.1 157.2,1169.06 U6.7 261.65,1169.06 332.8,1240.2 R2.2
NetS1_3: S1.3 U6.3 | length 3985.7
  Top Layer w10: U6.3 442.24,1194.65 427.24,1209.65 427.24,1234.65 447.24,1254.65 447.24,1949.65 357.24,2039.65 134.87,2039.65 78.24,2096.27 78.24,3475.65 227.24,3624.65 1032.24,3624.65 1166.24,3490.65 S1.3
VCC: C2.1 C14.1 C15.1 C16.1 C20.1 C21.1 R1.2 R3.1 U2.1 U6.4 U6.8 | length 2505.9
  Top Layer w10: R1.2 172.8,1070.2 222.24,1119.65 ; C21.1 223.16,927.56 267.24,927.56 ; U6.8 222.24,1138.46 222.24,1119.65 ; U6.4 562.83,1220.24 ; 507.24,834.65 410.16,834.65 C20.1 267.24,927.56 ; R3.1 C16.1@577.24,514.65 ; C16.1@587.24,497.56 C14.1@807.24,497.56 ; 222.24,1119.65 267.24,1074.65 267.24,927.56
  Top Layer w25: C16.1@577.24,514.65 573.7,511.1 507.24,577.56 507.24,834.65 507.24,1070.5 537.18,1100.43 537.18,1194.58 562.83,1220.24 569.24,1226.65 C2.1 1100.24,1227.65 U2.1
pads on no net: D1.0 D2.0 J2. J2.2 J2.6 U2.4 U2.5 U6.5 U7.2

## Polygon pours and split planes (outlines as drawn)
GND on Bottom Layer "Bottom Layer-GND" (solid, pour order 0): -2.76,-5.35 1967.24,-5.35 1967.24,3904.65 -2.76,3904.65

## Silkscreen, mask and mechanical layers (free items; w line width, h text height)
Mechanical 1:
  lines w10: 0,0 1968.5,0 1968.5,3897.64 0,3897.64 0,0 ; 114.4,2144.3 1846.69,2144.3 1846.69,3246.66 114.4,3246.66 114.4,2144.3

## Text inside footprints (layer, text, board x,y; h text height)
U7: Top Overlay "RX" at 567.24,3396.65 h60; Top Overlay "TX" at 1307.24,1916.65 h60; Top Overlay "TX" at 667.24,1966.65 h60 r180; Top Overlay "RX" at 1417.24,3466.65 h60 r180; Mechanical 1 "## CUT CUT CUT ## / ## CUT CUT CUT ## / ## CUT CUT CUT ## / ## CUT CUT CUT ## / ## CUT CUT CUT ## / ## CUT CUT CUT ## / ## CUT CUT CUT ## / ## CUT CUT CUT ## / ## CUT CUT CUT ## / ## CUT CUT CUT ## / ## CUT CUT CUT ## / ## CUT CUT CUT ## / ## CUT CUT CUT ## / ## CUT CUT CUT ## / ## CUT CUT CUT ## / ## CUT CUT CUT ## / ## CUT CUT CUT ## / ## CUT CUT CUT ##" at 1847.24,2176.65 h60 r90